# EAGLE board semi cnc v0 (EAGLE 9.6.2)
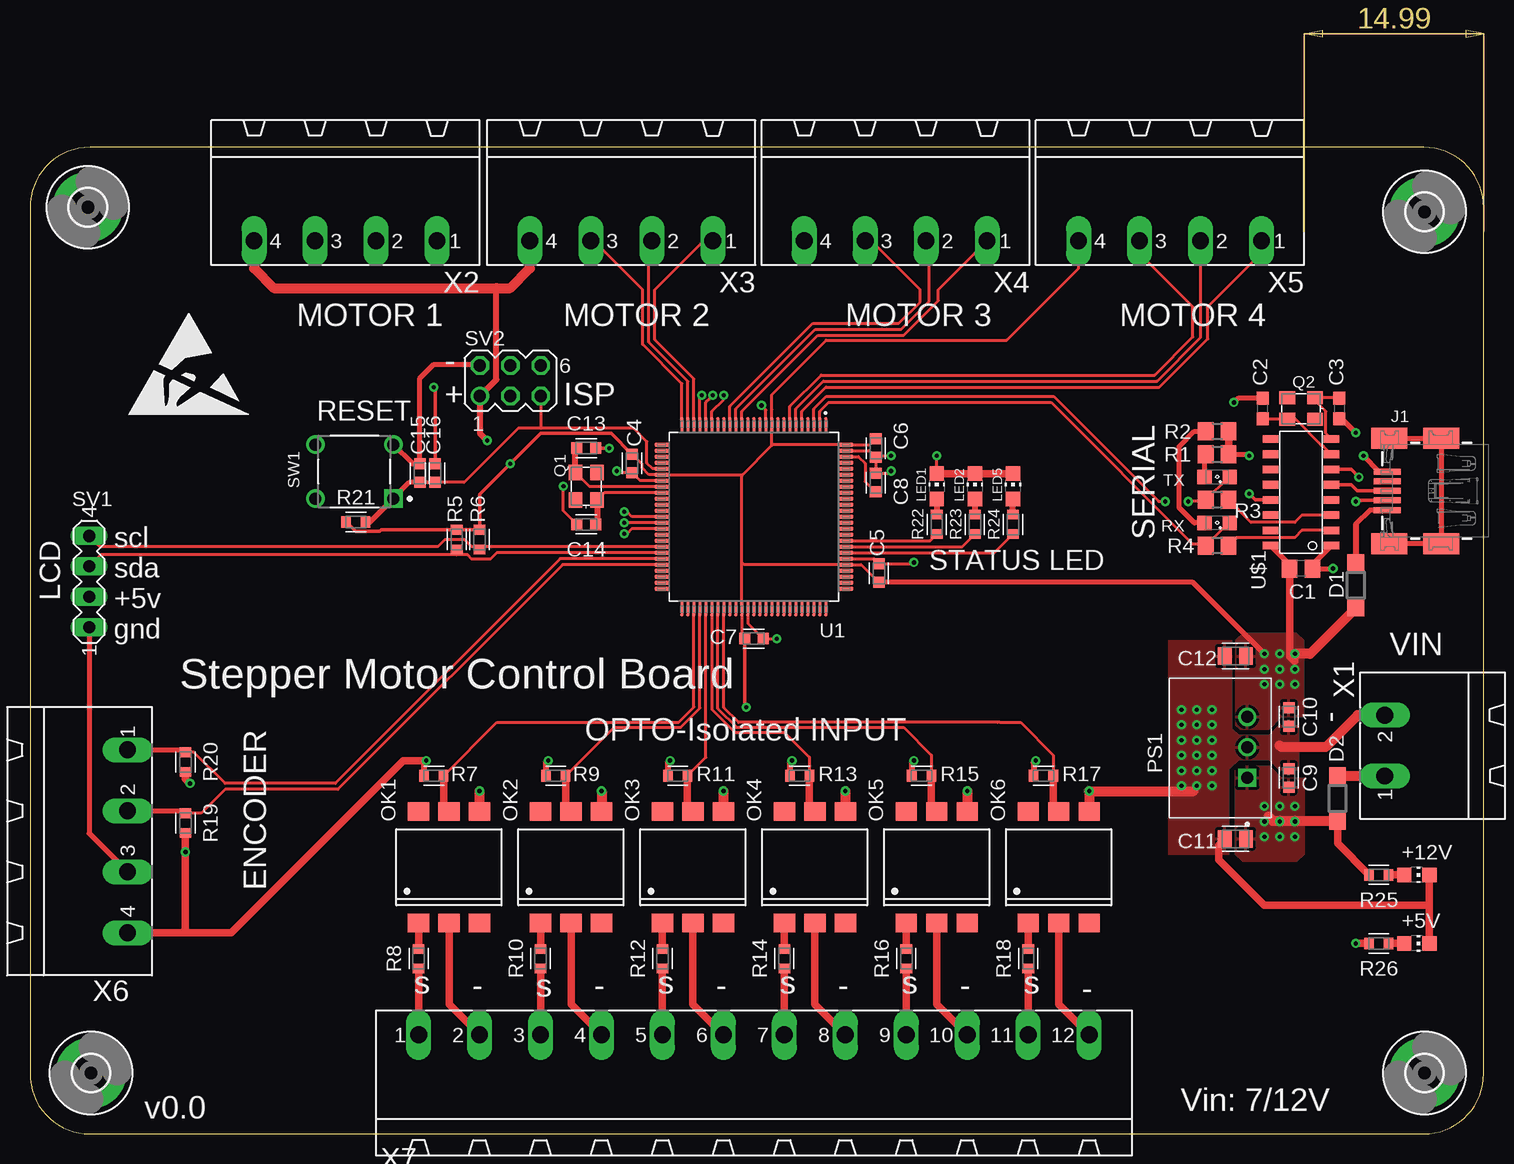
[diagram p0: board, top side]
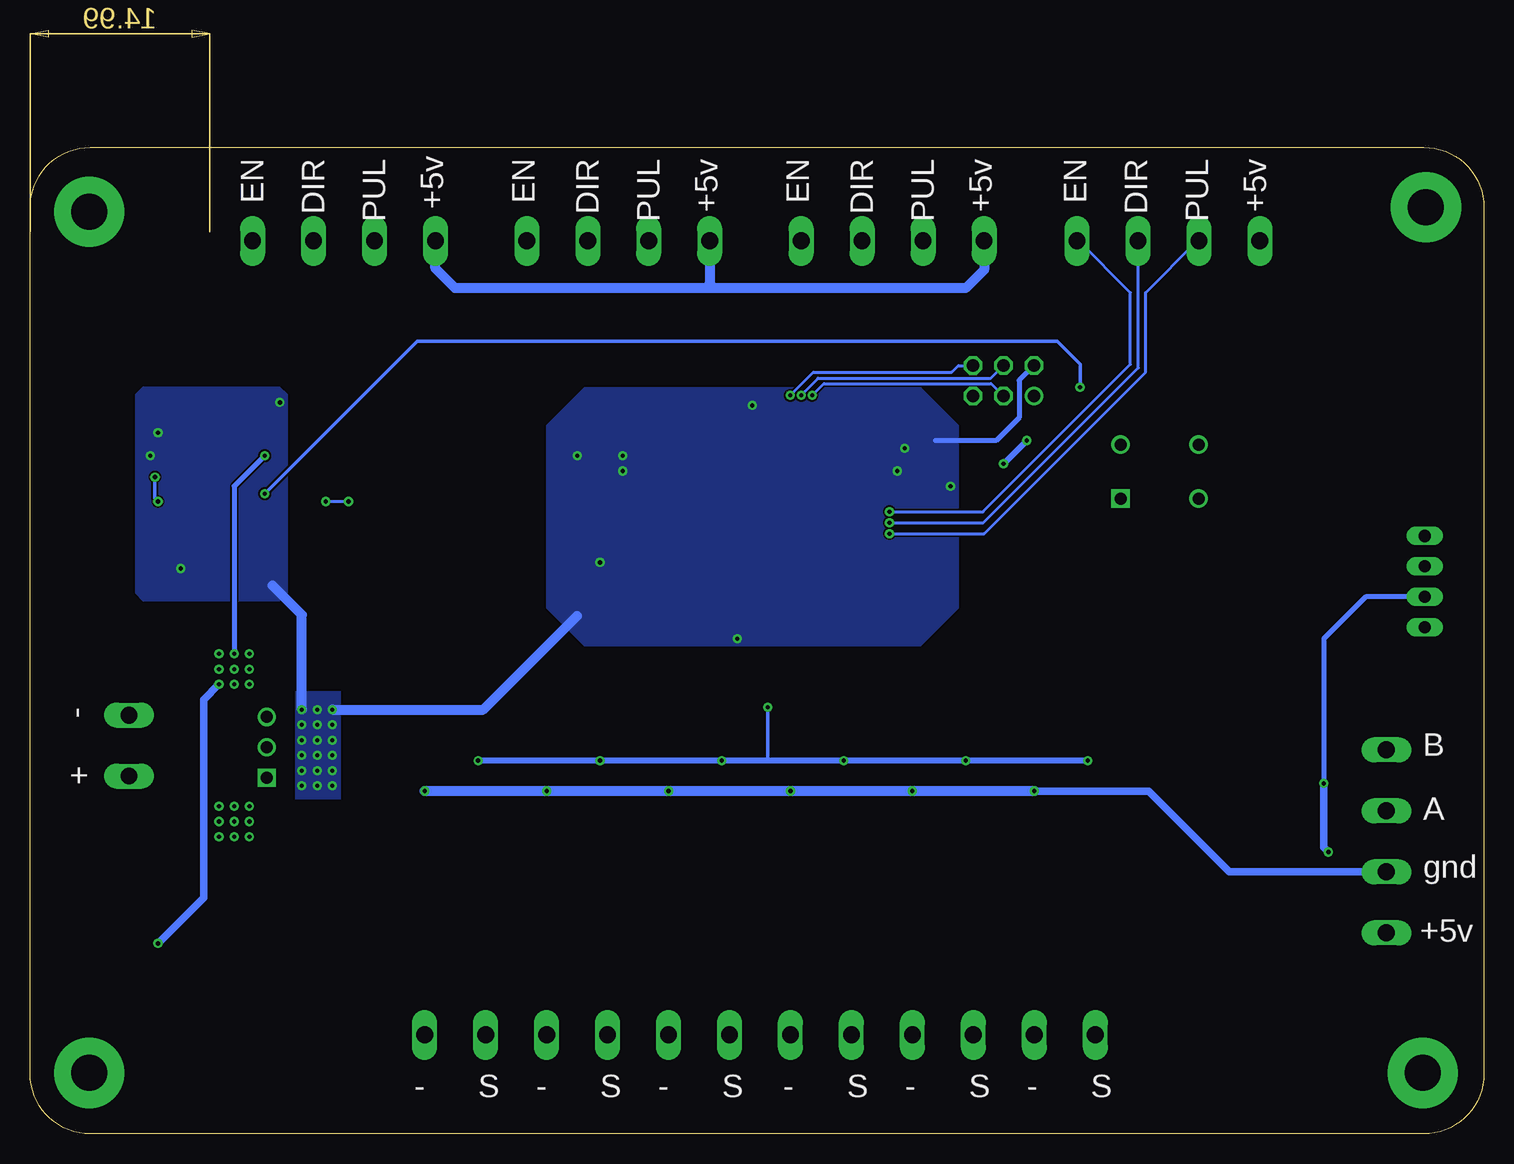
[diagram p1: board, bottom side, seen from below]

Size 121.14 x 82.22 mm. Coordinates in mm from the lower left corner, seen from the top.
Outline: 5,0 116.14,0 arc90 121.14,5 121.14,77.22 arc90 116.14,82.22 5,82.22 arc90 0,77.22 0,5 arc90 5,0
Copper layers (1*16): Top 0.035mm / dielectric 1.5mm / Bottom 0.035mm
Design rules "default": minimum track width 6mil, minimum drill 0.35mm, track to track 6mil, track to pad 6mil, pad to pad 6mil, via to via 6mil, smd to smd 6mil, copper to edge 40mil, drill to drill 6mil, minimum pad ring 10mil, minimum via ring 8mil, stop-mask expansion 4mil, vias tented up to drill 0mil, thermal gap 10mil

## Footprints (pad centres in the part's own frame; a part is rotated, then mirrored left to right if it is on the bottom)
CHIP-LED0805 = smd 1.2 x 1.2: A 0,-1.05; C 0,1.05
C0805 = smd 1.3 x 1.5: 1 -0.95,0; 2 0.95,0
C0603 = smd 1.1 x 1: 1 -0.85,0; 2 0.85,0
CAPC1608X85 = smd 0.921 x 0.97: 1 -0.775,0; 2 0.775,0
CAPC2012X110 = smd 1.165 x 1.465: 1 -0.875,0; 2 0.875,0
SOD123 = smd 1.4 x 1.4: A 1.9,0; C -1.9,0
3,0-PAD = drill 3 pad 5.842: B3,0 0,0
PMX42_56579-0576 = smd 0.5 x 2.25: 1 1.6,-0.2; 2 0.8,-0.2; 3 0,-0.2; 4 -0.8,-0.2; 5 -1.6,-0.2 | smd 1.75 x 3: S1 -4.4,0; S2 4.4,0; S3 -4.4,4.3; S4 4.4,4.3
DIL6-SMD = smd 1.78 x 1.52: 1 -2.54,-4.645; 2 0,-4.645; 3 2.54,-4.645; 4 2.54,4.645; 5 0,4.645; 6 -2.54,4.645
CONV_R-78E5.0-0.5 = drill 1 square: 1 -2.54,-2.25 | drill 1: 2 0,-2.25; 3 2.54,-2.25
3.2X2.5_KX-7 = smd 1.3 x 1.1: 1 -1.15,-0.9; 2 1.15,-0.9; 3 1.15,0.9; 4 -1.15,0.9
R0805 = smd 1.3 x 1.5: 1 -0.95,0; 2 0.95,0
RESC1608X60 = smd 0.799 x 0.974: 1 -0.815,0; 2 0.815,0
SML0805 = smd 1.2 x 1.2: A 1.05,0; C -1.05,0
MA04-1 = drill 1.016 long: 1 -3.81,0; 2 -1.27,0; 3 1.27,0; 4 3.81,0
MA03-2 = drill 1.016: 1 -2.54,-1.27 | drill 1.016 octagon: 2 -2.54,1.27; 3 0,-1.27; 4 0,1.27; 5 2.54,-1.27; 6 2.54,1.27
TE_1825910-7_0 = drill 0.99 pad 1.54 square: 1 -3.25,2.25 | drill 0.99 pad 1.54: 2 3.25,2.25; 3 -3.25,-2.25; 4 3.25,-2.25
TQFP-100 = smd 0.3 x 1.3: 1 -6,-7.63; 2 -5.5,-7.63; 3 -5,-7.63; 4 -4.5,-7.63; 5 -4,-7.63; 6 -3.5,-7.63; 7 -3,-7.63; 8 -2.5,-7.63; 9 -2,-7.63; 10 -1.5,-7.63; 11 -1,-7.63; 12 -0.5,-7.63; 13 0,-7.63; 14 0.5,-7.63; 15 1,-7.63; 16 1.5,-7.63; 17 2,-7.63; 18 2.5,-7.63; 19 3,-7.63; 20 3.5,-7.63; 21 4,-7.63; 22 4.5,-7.63; 23 5,-7.63; 24 5.5,-7.63; 25 6,-7.63; 51 6,7.63; 52 5.5,7.63; 53 5,7.63; 54 4.5,7.63; 55 4,7.63; 56 3.5,7.63; 57 3,7.63; 58 2.5,7.63; 59 2,7.63; 60 1.5,7.63; 61 1,7.63; 62 0.5,7.63; 63 0,7.63; 64 -0.5,7.63; 65 -1,7.63; 66 -1.5,7.63; 67 -2,7.63; 68 -2.5,7.63; 69 -3,7.63; 70 -3.5,7.63; 71 -4,7.63; 72 -4.5,7.63; 73 -5,7.63; 74 -5.5,7.63; 75 -6,7.63 | smd 1.3 x 0.3: 26 7.63,-6; 27 7.63,-5.5; 28 7.63,-5; 29 7.63,-4.5; 30 7.63,-4; 31 7.63,-3.5; 32 7.63,-3; 33 7.63,-2.5; 34 7.63,-2; 35 7.63,-1.5; 36 7.63,-1; 37 7.63,-0.5; 38 7.63,0; 39 7.63,0.5; 40 7.63,1; 41 7.63,1.5; 42 7.63,2; 43 7.63,2.5; 44 7.63,3; 45 7.63,3.5; 46 7.63,4; 47 7.63,4.5; 48 7.63,5; 49 7.63,5.5; 50 7.63,6; 76 -7.63,6; 77 -7.63,5.5; 78 -7.63,5; 79 -7.63,4.5; 80 -7.63,4; 81 -7.63,3.5; 82 -7.63,3; 83 -7.63,2.5; 84 -7.63,2; 85 -7.63,1.5; 86 -7.63,1; 87 -7.63,0.5; 88 -7.63,0; 89 -7.63,-0.5; 90 -7.63,-1; 91 -7.63,-1.5; 92 -7.63,-2; 93 -7.63,-2.5; 94 -7.63,-3; 95 -7.63,-3.5; 96 -7.63,-4; 97 -7.63,-4.5; 98 -7.63,-5; 99 -7.63,-5.5; 100 -7.63,-6
SOIC16 = smd 1.27 x 0.635: 1 -2.54,3.81; 2 -2.54,2.54; 3 -2.54,1.27; 4 -2.54,0; 5 -2.54,-1.27; 6 -2.54,-2.54; 7 -2.54,-3.81; 8 -2.54,-5.08; 9 2.54,-5.08; 10 2.54,-3.81; 11 2.54,-2.54; 12 2.54,-1.27; 13 2.54,0; 14 2.54,1.27; 15 2.54,2.54; 16 2.54,3.81
MSTBA2 = drill 1.397 long: 1 -2.54,5.08; 2 2.54,5.08
MSTBA4 = drill 1.397 long: 1 -7.62,5.08; 2 -2.54,5.08; 3 2.54,5.08; 4 7.62,5.08
MSTBA12 = drill 1.397 long: 1 -27.94,5.08; 2 -22.86,5.08; 3 -17.78,5.08; 4 -12.7,5.08; 5 -7.62,5.08; 6 -2.54,5.08; 7 2.54,5.08; 8 7.62,5.08; 9 12.7,5.08; 10 17.78,5.08; 11 22.86,5.08; 12 27.94,5.08

## Placement (x,y rotation side)
+5V  [CHIP-LED0805]  115.57,15.88 270 top
+12V  [CHIP-LED0805]  115.57,21.59 270 top
C1  100nf  [C0805]  105.92,47.12 180 top
C2  22pf  [C0603]  102.74,60.45 90 top
C3  22pf  [C0603]  109.09,60.45 270 top
C4  100n  [CAPC1608X85]  50.16,55.88 270 top
C5  100n  [CAPC1608X85]  70.74,46.74 90 top
C6  100n  [CAPC1608X85]  70.48,57.15 270 top
C7  100n  [CAPC1608X85]  60.33,41.27 0 top
C8  100n  [CAPC1608X85]  70.48,54.28 90 top
C9  100n  [CAPC1608X85]  104.9,29.67 90 top
C10  100n  [CAPC1608X85]  104.9,34.75 270 top
C11  10u  [CAPC2012X110]  100.46,24.59 180 top
C12  10u  [CAPC2012X110]  100.46,39.83 180 top
C13  22p  [CAPC1608X85]  46.35,57.15 0 top
C14  22p  [CAPC1608X85]  46.35,50.8 180 top
C15  100n  [CAPC1608X85]  32.49,55.07 90 top
C16  100n  [CAPC1608X85]  33.76,55.07 90 top
D1  1n5819  [SOD123]  110.49,45.72 90 top
D2  [SOD123]  108.97,27.97 90 top
H1  MOUNT-PAD-ROUND3.0  [3,0-PAD]  5.08,5.08 0 top
H2  MOUNT-PAD-ROUND3.0  [3,0-PAD]  4.83,77.22 0 top
H3  MOUNT-PAD-ROUND3.0  [3,0-PAD]  116.2,5.08 0 top
H4  MOUNT-PAD-ROUND3.0  [3,0-PAD]  116.2,76.83 0 top
J1  PMX42  [PMX42_56579-0576]  113.28,53.59 270 top
LED1  [CHIP-LED0805]  75.56,53.98 0 top
LED2  [CHIP-LED0805]  78.74,53.98 0 top
LED5  [CHIP-LED0805]  81.92,53.98 0 top
OK1  4N35SM  [DIL6-SMD]  34.92,22.23 0 top
OK2  4N35SM  [DIL6-SMD]  45.09,22.23 0 top
OK3  4N35SM  [DIL6-SMD]  55.24,22.23 0 top
OK4  4N35SM  [DIL6-SMD]  65.41,22.23 0 top
OK5  4N35SM  [DIL6-SMD]  75.56,22.23 0 top
OK6  4N35SM  [DIL6-SMD]  85.72,22.23 0 top
PS1  R-78E5.0-0.5  [CONV_R-78E5.0-0.5]  99.19,32.21 90 top
Q1  [3.2X2.5_KX-7]  46.35,53.98 90 top
Q2  [3.2X2.5_KX-7]  105.92,60.45 180 top
R1  1k  [R0805]  98.93,56.64 0 top
R2  1k  [R0805]  98.93,58.55 0 top
R3  1k  [R0805]  98.93,52.83 180 top
R4  1k  [R0805]  98.93,49.02 180 top
R5  4.7k  [RESC1608X60]  35.56,49.53 90 top
R6  4.7k  [RESC1608X60]  37.47,49.53 90 top
R7  10k  [RESC1608X60]  33.66,29.84 0 top
R8  2k  [RESC1608X60]  32.38,14.61 90 top
R9  10k  [RESC1608X60]  43.81,29.84 0 top
R10  2k  [RESC1608X60]  42.55,14.61 90 top
R11  10k  [RESC1608X60]  53.98,29.84 0 top
R12  2k  [RESC1608X60]  52.7,14.61 90 top
R13  10k  [RESC1608X60]  64.14,29.84 0 top
R14  2k  [RESC1608X60]  62.87,14.61 90 top
R15  10k  [RESC1608X60]  74.3,29.84 0 top
R16  2k  [RESC1608X60]  73.03,14.61 90 top
R17  10k  [RESC1608X60]  84.45,29.84 0 top
R18  2k  [RESC1608X60]  83.19,14.61 90 top
R19  10k  [RESC1608X60]  12.95,25.91 270 top
R20  10k  [RESC1608X60]  12.95,30.99 270 top
R21  [RESC1608X60]  27.15,51 0 top
R22  1k  [RESC1608X60]  75.56,50.8 270 top
R23  1k  [RESC1608X60]  78.74,50.8 270 top
R24  1k  [RESC1608X60]  81.92,50.8 270 top
R25  2k  [RESC1608X60]  112.39,21.59 180 top
R26  1k  [RESC1608X60]  112.39,15.88 180 top
RX  [SML0805]  98.93,50.93 180 top
SV1  [MA04-1]  4.93,46.02 90 top
SV2  [MA03-2]  40.03,62.76 0 top
SW1  TE_1825910-7TE_1825910-7_0_0  [TE_1825910-7_0]  27.03,55.19 180 top
TX  [SML0805]  98.93,54.74 180 top
U1  ATMEGA2560-16AU  [TQFP-100]  60.33,51.44 180 top
U$1  CH340  [SOIC16]  105.92,52.83 180 top
U$2  [ESD_10.00]  8.13,59.82 0 top
X1  MSTBA2  [MSTBA2]  117.98,32.36 90 top
X2  MSTBA4  [MSTBA4]  26.29,79.5 180 top
X3  MSTBA4  [MSTBA4]  49.28,79.5 180 top
X4  MSTBA4  [MSTBA4]  72.14,79.5 180 top
X5  MSTBA4  [MSTBA4]  95,79.5 180 top
X6  MSTBA4  [MSTBA4]  3.05,24.38 270 top
X7  MSTBA12  [MSTBA12]  60.33,3.17 0 top

## Library data of the parts
+5V +12V LED1 LED2 LED5 RX TX = led
C1-C3 R1-R4 = resistor
C4-C16 = Capacitor; CATEGORY: Capacitor
D1 D2 = diode
H1-H4 = holes
J1 = 52101-101-REV-A
OK1-OK6 = optocoupler; MF: FAIRCHILD SEMICONDUCTOR; MPN: 4N35S-M; OC_FARNELL: 1021179; OC_NEWARK: 67K2285
PS1 = R-78E5.0-0.5; ARROW_ELECTRONICS-PURCHASE-URL: https://snapeda.com/shop?store=Arrow+Electronics&id=229067; AVAILABILITY: Unavailable; DESCRIPTION: Switching regulator module - DC/DC converter . Single Output. 7.0V to 28.0V input voltage range and 5 V output voltage range; DIGIKEY-PURCHASE-URL: https://snapeda.com/shop?store=DigiKey&id=229067; MF: Recom Power; MOUSER-PURCHASE-URL: https://snapeda.com/shop?store=Mouser&id=229067; MP: R-78E5.0-0.5; PACKAGE: SIP-3 Recom Power; PRICE: None
Q1 Q2 = crystal-geyer_V1_0
R5-R26 = Resistor; CATEGORY: Resistor; SUB-CATEGORY: Fixed
SV1 SV2 = con-lstb; OC_FARNELL: unknown; OC_NEWARK: unknown
SW1 = TE - 1825910-7; ACTUATOR_HEIGHT_OFF_PCB,_VERTICAL: 5.00mm; ACTUATOR_MATERIAL: Polybutylene Terephthalate (PBT); ACTUATOR_ORIENTATION: Top Actuated; ACTUATOR_TYPE: Standard; CENTROID_NOT_SPECIFIED: No; CIRCUIT: SPST-NO; CONTACT_RATING_@_VOLTAGE: 0.05A @ 24VDC; DATASHEET: http://www.te.com/commerce/DocumentDelivery/DDEController?Action=srchrtrv&DocNm=1825910&DocType=Customer+Drawing&DocLang=English; DIGIKEY_DESCRIPTION: SWITCH Tactile Switch SPST-NO Top Actuated Through Hole; DIGIKEY_PART_NUMBER: 450-1804-ND; ILLUMINATION: Non-Illuminated; LEAD_FREE: yes; MECHANICAL_LIFE: 100,000 Cycles; MF: TE; MOUNTING_TYPE: Through Hole; MOUSER_PART_NUMBER: 506-FSM4JAH; MPN: 1825910-7; OPERATING_FORCE: 260gf; OUTLINE: 6.00mm x 6.00mm; PACKAGE: Through Hole; PREFIX: SW; ROHS: yes; SWITCH_FUNCTION: Off-Mom; SWITCH_TRAVEL: 0.25mm; TEMPERATURE_RANGE_HIGH: +85°C; TEMPERATURE_RANGE_LOW: -35°C; TERMINATION_STYLE: PC Pin
U1 = Microcontroller; CREATED_BY: PCBLayout.com; DIGIKEY_PART_NUMBER: ATMEGA2560-16AU-ND; MANUFACTURER: Microchip Technology; MPN: ATMEGA2560-16AU; PACKAGE: TQFP-100
U$1 = CH340; AVAILABILITY: Unavailable; DESCRIPTION: Circuit Breaker Magnetic 3Pole 40A 240VAC; MF: Eaton; MP: CH340; PACKAGE: None; PRICE: None
U$2 = logo
X1 = con-phoenix-508; MF: FARNELL; MPN: 1757242; OC_FARNELL: 3705171; OC_NEWARK: 71C4161
X2-X6 = con-phoenix-508; MF: FARNELL; MPN: 1757268; OC_FARNELL: 3705195; OC_NEWARK: 71C4163
X7 = con-phoenix-508; MPN: 1757349; OC_FARNELL: 3705250; OC_NEWARK: 71C4169

## Nets
+3V3: U$1.4
+5V: C1.2 C4.1 C5.1 C6.1 C7.1 C10.1 C12.1 D1.C PS1.3 R1.2 R2.2 R5.2 R6.2 R7.1 R9.1 R11.1 R13.1 R15.1 R17.1 R19.2 R20.2 R21.1 R26.2 SV1.2 SV2.1 U1.10 U1.31 U1.61 U1.80 U1.100 U$1.16 X2.4 X3.4 X4.4 X5.4 X6.4
+12V: C9.1 C11.1 D2.C PS1.1 R25.2
AREF: C8.1 U1.98
B1: OK1.5 R7.2 U1.53
B2: OK2.5 R9.2 U1.54
B3: OK3.5 R11.2 U1.55
B4: OK4.5 R13.2 U1.56
B5: OK5.5 R15.2 U1.57
B6: OK6.5 R17.2 U1.58
DIR1: U1.39 X2.2
DIR2: U1.24 X3.2
DIR3: U1.16 X4.2
DIR4: U1.6 X5.2
DTR: C16.2 U$1.13
EN1: U1.38 X2.1
EN2: U1.23 X3.1
EN3: U1.15 X4.1
EN4: U1.5 X5.1
ENCA: R19.1 U1.46 X6.2
ENCB: R20.1 U1.45 X6.1
GND: +5V.C +12V.C C1.1 C2.2 C3.2 C4.2 C5.2 C6.2 C7.2 C8.2 C9.2 C10.2 C11.2 C12.2 C13.2 C14.2 C15.2 J1.5 LED1.C LED2.C LED5.C OK1.4 OK2.4 OK3.4 OK4.4 OK5.4 OK6.4 PS1.2 SV1.1 SV2.2 SW1.3 U1.11 U1.32 U1.62 U1.81 U1.99 U$1.1 X1.2 X6.3
GND1: OK1.2 X7.2
GND2: OK2.2 X7.4
GND3: OK3.2 X7.6
GND4: OK4.2 X7.8
GND5: OK5.2 X7.10
GND6: OK6.2 X7.12
IN1: R8.1 X7.1
IN2: R10.1 X7.3
IN3: R12.1 X7.5
IN4: R14.1 X7.7
IN5: R16.1 X7.9
IN6: R18.1 X7.11
LD1: R22.2 U1.84
LD2: R23.2 U1.83
LD3: R24.2 U1.82
MISO: SV2.3 U1.22
MOSI: SV2.4 U1.21
N$1: J1.S1 J1.S2 J1.S3 J1.S4
N$2: D2.A X1.1
N$3: OK4.1 R14.2
N$4: OK1.1 R8.2
N$5: OK5.1 R16.2
N$6: OK6.1 R18.2
N$7: OK2.1 R10.2
N$8: C13.1 Q1.3 U1.33
N$9: LED5.A R24.1
N$10: OK3.1 R12.2
N$11: LED2.A R23.1
N$12: LED1.A R22.1
N$13: R4.1 U$1.2
N$14: R3.1 U$1.3
N$15: C3.1 Q2.1 U$1.8
N$16: C2.1 Q2.3 U$1.7
N$17: R2.1 RX.A
N$18: R1.1 TX.A
N$19: C14.1 Q1.1 U1.34
N$20: +12V.A R25.1
N$21: +5V.A R26.1
NRST: C15.1 C16.1 R21.2 SV2.5 SW1.1 U1.30
PUL1: U1.40 X2.3
PUL2: U1.25 X3.3
PUL3: U1.17 X4.3
PUL4: U1.7 X5.3
RX0: R4.2 RX.C U1.2
SCK: SV2.6 U1.20
SCL: R6.1 SV1.4 U1.43
SDA: R5.1 SV1.3 U1.44
TX0: R3.2 TX.C U1.3
UD+: J1.3 U$1.5
UD-: J1.2 U$1.6
VBUS: D1.A J1.1

## Tracks (layer width: path | path; a pad name or v marks a point on that pad's centre or on a via)
+5V  (via drill 0.35)
  Top 0.254: C6.1 70,57.44 U1.100 61.88,57.44 61.83,57.38 | C7.1 59.33,41.5 U1.61 59.33,47.62 | C5.1 69.27,47.44 U1.80 59.52,47.44 59.33,47.62 | C4.1 51,55.82 51,55.51 51.58,54.94 U1.31 59.38,54.94 | X5.4 87.38,72.14 81.38,66.14 66.35,66.14 61.83,61.62 61.83,60.35 U1.10 61.83,57.38 | 59.38,54.94 61.83,57.38 | 59.33,47.62 59.33,54.88 59.38,54.94
  Top 0.305: R21.1 27.13,50.21 29.13,50.21 29.26,50.34 R5.2 R6.2 37.47,53.29 v40.03,55.85 42.55,58.37 48.45,58.37 C4.1 | C7.1 59.55,35.7 v59.69,35.56
  Top 0.406: C1.2 104.97,47.43 U$1.16 | R1.2 101.47,56.64 v101.6,56.52 | v102.87,40.01 96.91,45.96 C5.1
  Top 0.508: R7.1 32.84,30.93 v33.02,31.11 | v43.18,31.11 43,30.93 R9.1 | v53.34,31.11 53.16,30.93 R11.1 | v63.5,31.11 63.32,30.93 R13.1 | v73.66,31.11 73.48,30.93 R15.1 | v83.82,31.11 83.64,30.93 R17.1 | 38.86,70.48 38.86,62.87 SV2.1 37.49,58.4 v38.1,57.78
  Top 0.61: X6.4 12.7,16.76 | 12.7,16.76 16.76,16.76 31.11,31.11 v33.02,31.11 | R19.2 v12.95,23.5 12.95,17.02 12.7,16.76 | R20.2 12.95,29.59 v13.34,29.21 | R26.2 v110.49,15.88 | R1.2 R2.2 | C1.2 104.97,39.81 105.41,39.37 v105.41,40.01
  Top 0.813: X2.4 18.67,72.14 20.32,70.48 38.86,70.48 40.01,70.48 41.66,72.14 X3.4 | D1.C 106.67,40.01 v105.41,40.01
  Bottom 0.305: v59.69,35.56 59.69,31.11
  Bottom 0.406: v101.6,56.52 104.14,53.98 v104.14,40.01 | SV1.2 9.86,44.76 13.34,41.27 v13.34,29.21
  Bottom 0.508: v33.02,31.11 v43.18,31.11 v53.34,31.11 59.69,31.11 v63.5,31.11 v73.66,31.11 v83.82,31.11 | v38.1,57.78 v40.03,55.85
  Bottom 0.61: v13.34,29.21 13.34,23.88 v12.95,23.5 | v110.49,15.88 106.68,19.68 106.68,36.2 v105.41,37.47
  Bottom 0.813: X3.4 41.66,72.01 43.18,70.48 64.14,70.48 | 64.14,70.48 85.72,70.48 87.38,72.14 X5.4 | X4.4 64.52,70.87 64.14,70.48
  other vias: 102.87,38.73 104.14,38.73 105.41,38.73 102.87,37.47 104.14,37.47
  pour Top: 100.46,41.1 100.46,34.11 100.84,33.73 103.25,33.73 104.27,34.75 106.17,34.75 106.17,41.1 105.54,41.73 101.09,41.73
+12V  (via drill 0.35)
  Top 0.61: R25.2 108.97,24.2 D2.C
  Top 0.813: D2.C 103.6,26.07 103.23,26.44
  other vias: 102.87,27.3 104.14,27.3 105.41,27.3 102.87,26.04 104.14,26.04 105.41,26.04 105.41,24.77 104.14,24.77 102.87,24.77
  pour Top: 100.46,23.32 100.46,30.3 100.84,30.68 103.25,30.68 104.27,29.67 106.17,29.67 106.17,23.32 105.54,22.68 101.09,22.68
AREF
  Top 0.254: U1.98 69.04,56.44 69.6,55.88 69.6,54.36 70.45,53.51 C8.1
B1
  Top 0.254: U1.53 55.33,35.56 54.05,34.29 38.91,34.29 R7.2
  Top 0.61: OK1.5 34.47,27.32 R7.2
B2
  Top 0.254: R9.2 48.67,33.88 54.22,33.88 55.83,35.48 U1.54
  Top 0.61: R9.2 44.63,27.32 OK2.5
B3
  Top 0.254: U1.55 56.33,31.38 R11.2
  Top 0.61: R11.2 54.79,27.32 OK3.5
B4
  Top 0.254: R13.2 64.95,31.39 62.87,33.48 58.72,33.48 56.83,35.37 U1.56
  Top 0.61: R13.2 64.95,27.32 OK4.5
B5
  Top 0.254: U1.57 57.33,35.45 58.89,33.88 72.8,33.88 75.11,31.57 R15.2
  Top 0.61: R15.2 75.11,27.32 OK5.5
B6
  Top 0.254: U1.58 57.83,35.52 59.05,34.29 80.64,34.29 80.83,34.29 82.55,34.29 85.27,31.57 R17.2
  Top 0.61: R17.2 85.27,27.32 OK6.5
DIR1  (via drill 0.35)
  Top 0.254: U1.39 v49.53,50.94
  Bottom 0.254: v49.53,50.94 41.7,50.94 28.8,63.83 28.8,73.35 28.83,73.37 X2.2
DIR2
  Top 0.254: U1.24 54.83,62.72 51.57,65.98 51.57,73.13 51.82,73.37 X3.2
DIR3
  Top 0.254: U1.16 58.83,60.43 65.44,67.05 72.6,67.05 74.92,69.37 74.92,73.13 74.7,73.35 74.68,73.37 X4.2
DIR4
  Top 0.254: U1.6 63.83,60.43 66.12,62.73 93.92,62.73 97.56,66.37 97.56,73.35 97.54,73.37 X5.2
DTR  (via drill 0.35)
  Top 0.305: U$1.13 102.11,52.83 v101.6,53.34 | v33.66,62.23 33.76,62.13 C16.2
  Bottom 0.305: v101.6,53.34 88.9,66.04 35.56,66.04 33.66,64.14 v33.66,62.23
EN1  (via drill 0.35)
  Top 0.254: U1.38 50.16,51.44 49.76,51.84 v49.53,51.84
  Bottom 0.254: v49.53,51.84 41.76,51.84 29.46,64.14 29.46,70.1 33.78,74.42 X2.1
EN2
  Top 0.254: U1.23 55.33,62.93 52.07,66.18 52.07,70.36 56.13,74.42 X3.1
EN3
  Top 0.254: U1.15 59.33,60.22 65.65,66.55 72.8,66.55 75.69,69.44 75.69,70.36 X4.1
EN4
  Top 0.254: U1.5 64.33,60.22 66.33,62.23 94.12,62.23 98.16,66.26 98.16,68.91 102.62,73.37 X5.1
ENCA
  Top 0.254: U1.46 44.39,47.44 25.66,28.71 16.26,28.71 14.27,26.72 R19.1
  Top 0.406: X6.2 12.75,26.92 R19.1
ENCB
  Top 0.254: U1.45 44.18,47.94 25.45,29.21 16.26,29.21 13.66,31.8 R20.1
  Top 0.406: X6.1 12.75,32 R20.1
GND  (via drill 0.35)
  Top 0.254: U1.99 69.92,56.94 C6.2 | U1.62 59.83,42.55 C7.2 v62.23,41.27 | U1.32 50.84,54.44 C4.2 49.03,55.1 v48.9,55.24 | U1.81 70.31,47.94 C5.2 73.55,47.51 v73.66,47.62 | C6.2 C8.2 71.56,55.05 v71.75,55.24 | C6.2 70.62,56.52 v71.75,56.52 | C14.2 44.45,51.93 v44.45,53.98 | LED1.C v75.56,56.52 | U1.11 61.33,60.34 v60.96,60.71
  Top 0.305: C13.2 v48.26,57.15
  Top 0.406: U$1.1 106.87,47.43 C1.1 v108.58,47.12 | SW1.3 31.88,55.84 C15.2 32.49,62.97 33.66,64.14 37.39,64.14 SV2.2 | C2.2 100.67,61.3 v100.33,60.96 | C3.2 109.31,59.6 v110.49,58.42 | J1.5 112.45,55.19 v111.12,56.52 | SV1.1 4.93,25.04 X6.3
  Top 0.61: +12V.C 116.62,19.05 | 116.62,19.05 +5V.C | 116.62,19.05 102.87,19.05 99.06,22.86 99.06,24.07 C11.2 | LED1.C LED2.C LED5.C
  Top 0.813: OK1.4 v37.47,28.57 | v47.62,28.57 OK2.4 | v57.78,28.57 OK3.4 | v67.94,28.57 OK4.4 | v78.11,28.57 OK5.4 | OK6.4 v88.27,28.57 96.98,28.57 | X1.2 110.64,34.9 107.97,32.23 104.29,32.23 104.14,32.38
  Bottom 0.406: SV2.2 38.73,62.79 38.73,59.69 40.64,57.78 45.72,57.78
  Bottom 0.61: X6.3 21.21,21.84 27.94,28.57 v37.47,28.57
  Bottom 0.813: v37.47,28.57 v47.62,28.57 v57.78,28.57 v67.94,28.57 v78.11,28.57 v88.27,28.57 | v95.96,35.36 83.39,35.36 75.56,43.18 | v98.5,35.36 98.5,43.26 100.97,45.72
  other vias: 97.23,35.36 98.5,34.09 97.23,34.09 95.96,34.09 95.96,32.82 97.23,32.82 98.5,32.82 98.5,31.55 97.23,31.55 95.96,31.55 95.96,30.28 97.23,30.28 98.5,30.28 95.96,29.01 97.23,29.01 98.5,29.01
  pour Top: 99.95,23.32 99.95,30.43 100.71,31.19 103.25,31.19 104.52,29.92 105.54,29.92 105.79,30.18 105.79,34.24 105.54,34.49 104.52,34.49 103.25,33.22 100.71,33.22 100.2,33.73 100.2,41.1 94.87,41.1 94.87,23.32
  pour Bottom: 43.81,59.05 43.81,43.81 46.99,40.64 74.93,40.64 78.11,43.81 78.11,59.05 74.93,62.23 46.99,62.23
  pour Bottom: 95.25,36.83 99.06,36.83 99.06,27.94 95.25,27.94
  pour Bottom: 100.33,62.23 111.76,62.23 112.39,61.59 112.39,45.09 111.76,44.45 100.33,44.45 99.69,45.09 99.69,61.59
GND1
  Top 0.61: OK1.2 34.92,10.79 X7.2
GND2
  Top 0.61: OK2.2 45.09,10.79 X7.4
GND3
  Top 0.61: OK3.2 55.24,10.79 X7.6
GND4
  Top 0.61: OK4.2 65.41,10.79 X7.8
GND5
  Top 0.61: OK5.2 75.56,10.79 X7.10
GND6
  Top 0.61: OK6.2 85.72,10.79 X7.12
IN1
  Top 0.61: R8.1 X7.1
IN2
  Top 0.61: X7.3 R10.1
IN3
  Top 0.61: X7.5 R12.1
IN4
  Top 0.61: X7.7 R14.1
IN5
  Top 0.61: X7.9 R16.1
IN6
  Top 0.61: X7.11 R18.1
LD1
  Top 0.254: U1.84 75.02,49.44 R22.2
LD2
  Top 0.254: U1.83 77.69,48.94 R23.2
LD3
  Top 0.254: U1.82 80.36,48.44 R24.2
MISO  (via drill 0.35)
  Top 0.254: v55.98,61.54 55.83,61.39 U1.22
  Bottom 0.254: SV2.3 41.07,62.53 54.99,62.53 v55.98,61.54
MOSI  (via drill 0.35)
  Top 0.254: v56.89,61.54 56.64,61.29 56.64,61.27 56.33,60.96 U1.21
  Bottom 0.254: v56.89,61.54 56.64,61.8 56.64,61.82 55.47,62.98 41.08,62.98 SV2.4
N$1
  Top 0.406: J1.S1 J1.S3 J1.S4 J1.S2
N$2
  Top 0.813: X1.1 109.01,29.82 D2.A
N$3
  Top 0.61: R14.2 OK4.1
N$4
  Top 0.61: R8.2 OK1.1
N$5
  Top 0.61: OK5.1 R16.2
N$6
  Top 0.61: R18.2 OK6.1
N$7
  Top 0.61: R10.2 OK2.1
N$8
  Top 0.254: U1.33 46.65,53.94 Q1.3
  Top 0.508: Q1.3 45.45,57.02 C13.1
N$9
  Top 0.508: R24.1 LED5.A
N$10
  Top 0.61: OK3.1 R12.2
N$11
  Top 0.508: LED2.A R23.1
N$12
  Top 0.508: LED1.A R22.1
N$13
  Top 0.254: U$1.2 106,50.29 105.4,49.7 100.56,49.7 R4.1
N$14
  Top 0.254: U$1.3 106,51.56 105.4,50.97 101.75,50.97 R3.1
N$15
  Top 0.254: U$1.8 108,58.37 108,60.22 107.07,61.15 Q2.1 109.04,61.35
  Top 0.406: 109.04,61.35 C3.1
N$16
  Top 0.254: U$1.7 107.78,57.31 107.71,57.31 105.42,59.6 104.72,59.6 | Q2.3 102.79,59.55 C2.1
  Top 0.406: 104.72,59.6 Q2.3
N$17
  Top 0.406: R2.1 97.88,58.45 97.78,58.55 97.03,58.55 95.76,57.28 95.76,52.2 97.03,50.93 RX.A
N$18
  Top 0.406: TX.A 97.88,56.54 R1.1
N$19
  Top 0.254: U1.34 47.87,53.44 Q1.1
  Top 0.508: Q1.1 47.26,50.92 C14.1
N$20
  Top 0.61: R25.1 +12V.A
N$21
  Top 0.61: R26.1 +5V.A
NRST
  Top 0.254: U1.30 51.88,55.44 51.41,55.91 51.41,57.68 50.29,58.8 42.57,58.8 42.57,58.83 | C16.1 33.77,54.3 36.17,54.3 40.69,58.83 42.57,58.83 | C16.1 32.38,54.29 | C15.1 C16.1 | SV2.5 42.57,58.83
  Top 0.406: 32.38,54.29 31.62,54.29 SW1.1 28.34,51 R21.2
PUL1  (via drill 0.35)
  Top 0.254: U1.40 50.16,50.44 49.76,50.03 v49.53,50.03
  Bottom 0.254: v49.53,50.03 41.65,50.03 28.19,63.48 28.19,70.1 23.88,74.42 X2.3
PUL2
  Top 0.254: U1.25 54.33,62.52 51.05,65.79 51.05,70.36 47.24,74.17 46.74,74.17 X3.3
PUL3
  Top 0.254: U1.17 58.33,60.64 65.24,67.55 72.39,67.55 74.17,69.33 74.17,70.36 70.1,74.42 X4.3
PUL4
  Top 0.254: U1.7 63.33,60.64 65.92,63.23 93.71,63.23 96.9,66.42 96.9,68.93 92.46,73.37 X5.3
RX0
  Top 0.254: R4.2 98.14,49.18 | 98.14,49.18 99.89,50.93 RX.C | U1.2 65.83,60.22 66.56,60.96 85.09,60.96 96.87,49.18 98.14,49.18
SCK  (via drill 0.35)
  Top 0.254: U1.20 56.83,60.22 57.8,61.2 v57.8,61.54
  Bottom 0.254: v57.8,61.54 57.55,61.8 57.55,61.82 55.88,63.48 44.35,63.48 43.8,64.03 SV2.6
SCL
  Top 0.254: U1.43 37.47,48.94 | 37.47,48.94 36.8,48.94 36.24,49.49 34.55,49.49 33.99,48.94 5.83,48.94 SV1.4 | R6.1 37.47,48.94
SDA
  Top 0.254: U1.44 38.9,48.44 38.37,47.91 36.81,47.91 36.46,48.26 35.56,48.26 | SV1.3 5.89,48.26 35.56,48.26 | R5.1 35.56,48.26
TX0  (via drill 0.35)
  Top 0.254: v96.52,52.7 97.86,52.7 R3.2 99.89,54.74 TX.C | U1.3 65.33,60.43 66.36,61.46 85.3,61.46 94.05,52.7 v94.61,52.7
  Bottom 0.254: v96.52,52.7 v94.61,52.7
UD+
  Top 0.305: J1.3 110.62,53.59 110.11,54.1 U$1.5
UD-  (via drill 0.35)
  Top 0.305: U$1.6 110.11,55.37 v110.74,54.74 | v110.49,52.7 110.58,52.79 J1.2
  Bottom 0.305: v110.74,54.74 110.74,52.96 v110.49,52.7
VBUS
  Top 0.406: J1.1 111.68,51.99 110.49,50.8
  Top 0.508: 110.49,50.8 D1.A

## Text on the board
tPlace: MOTOR 1 | MOTOR 2 | MOTOR 3 | MOTOR 4 | - | + | ISP | RESET | SERIAL | scl | STATUS LED | sda | LCD | +5v | gnd | VIN | Stepper Motor Control Board | - | OPTO-Isolated INPUT | ENCODER | s | s | s | s | s | - | s | - | - | - | - | - | Vin: 7/12V | v0.0
bPlace: +5v | +5v | PUL | DIR | EN | +5v | PUL | DIR | EN | +5v | PUL | DIR | EN | PUL | DIR | EN | - | B | + | A | gnd | +5v | S | - | S | - | S | - | S | - | S | - | S | -